# Altium PCB lm3478.PcbDoc
Units mil, origin at the board's own origin, x right, y up, seen from the top; angles counter-clockwise.
Board outline 1877.8 x 1600 mil, 2 copper layers (Top Layer, Bottom Layer); 30 components, 17 nets, 73 pads, 16 vias.
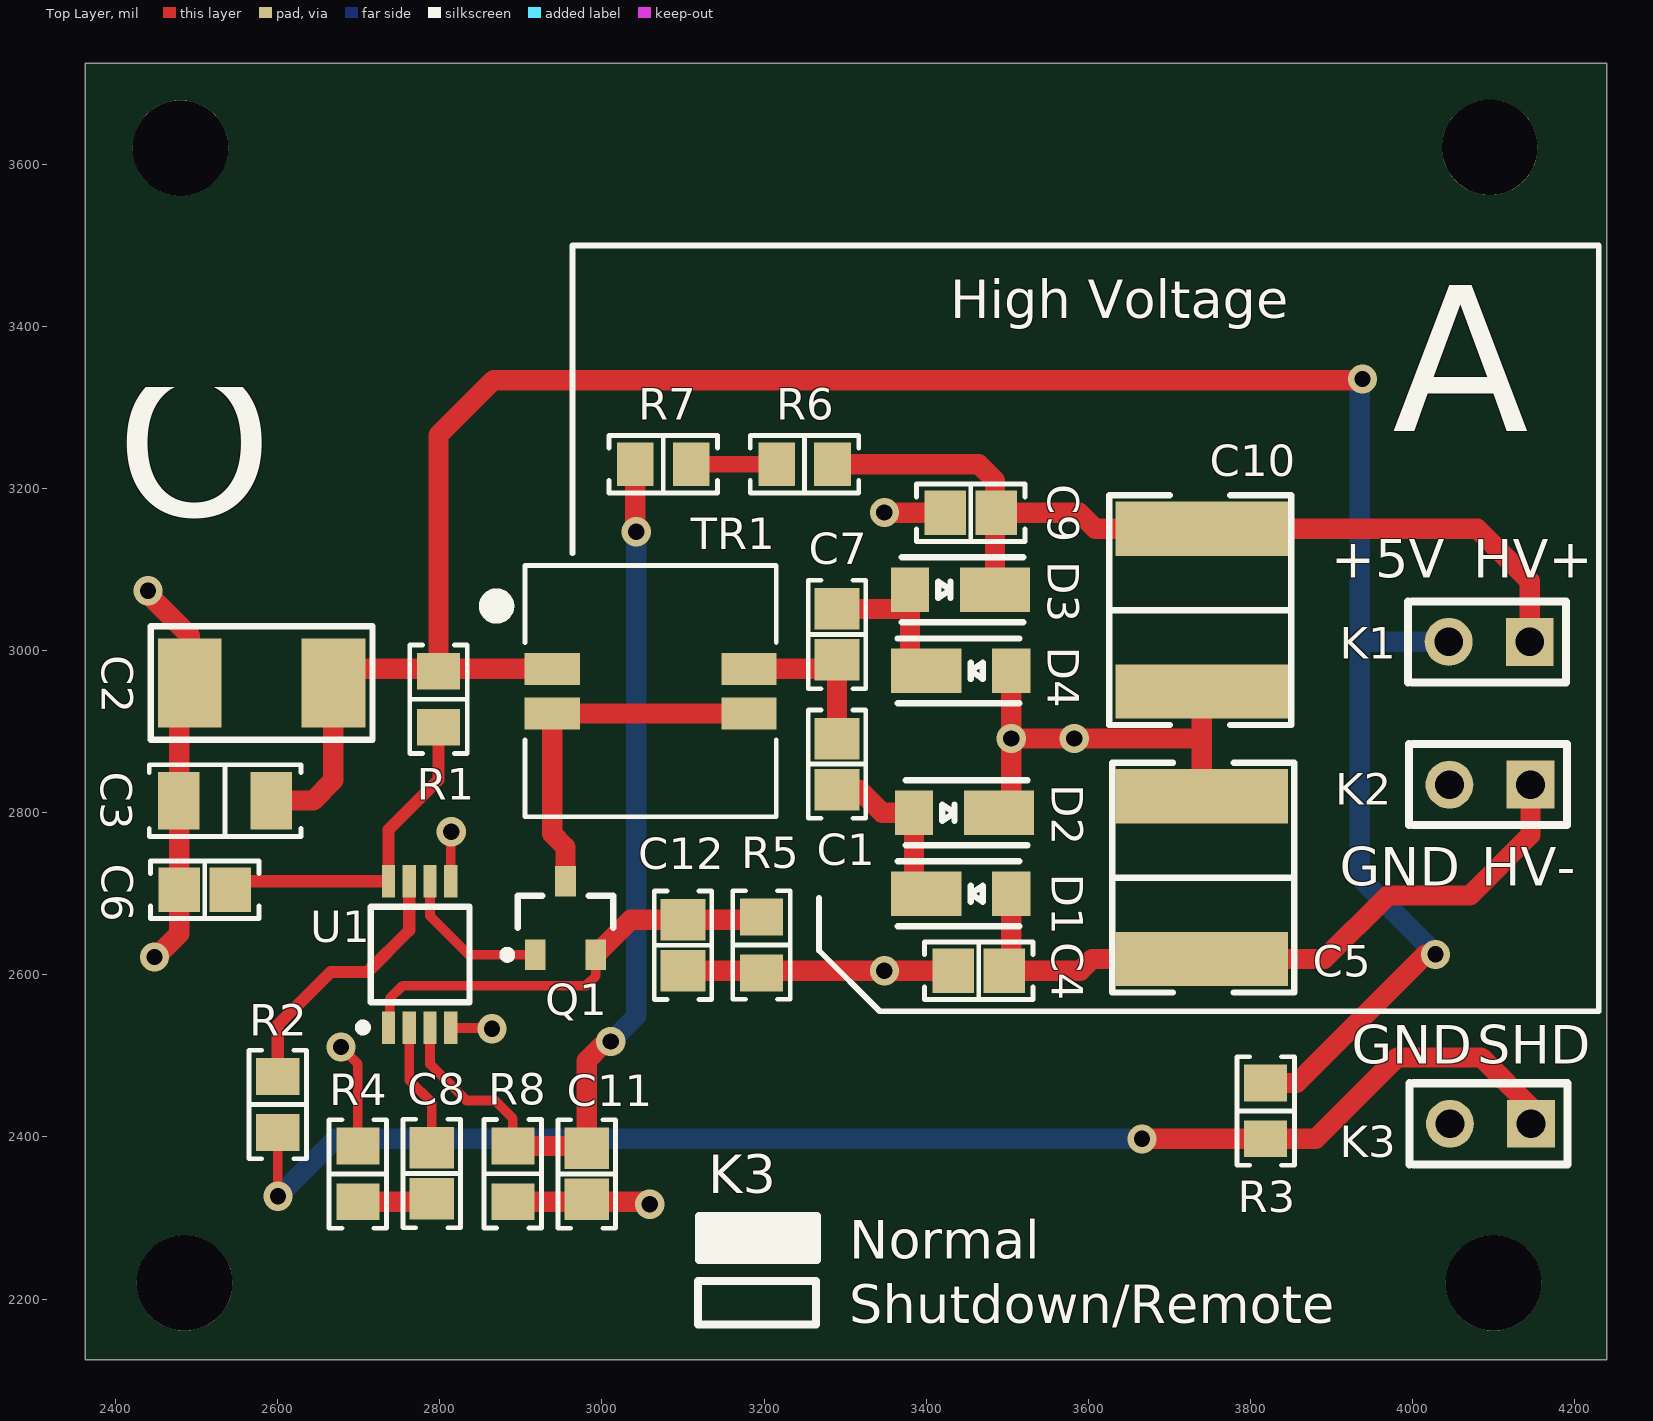
[diagram p0: Top Layer view]
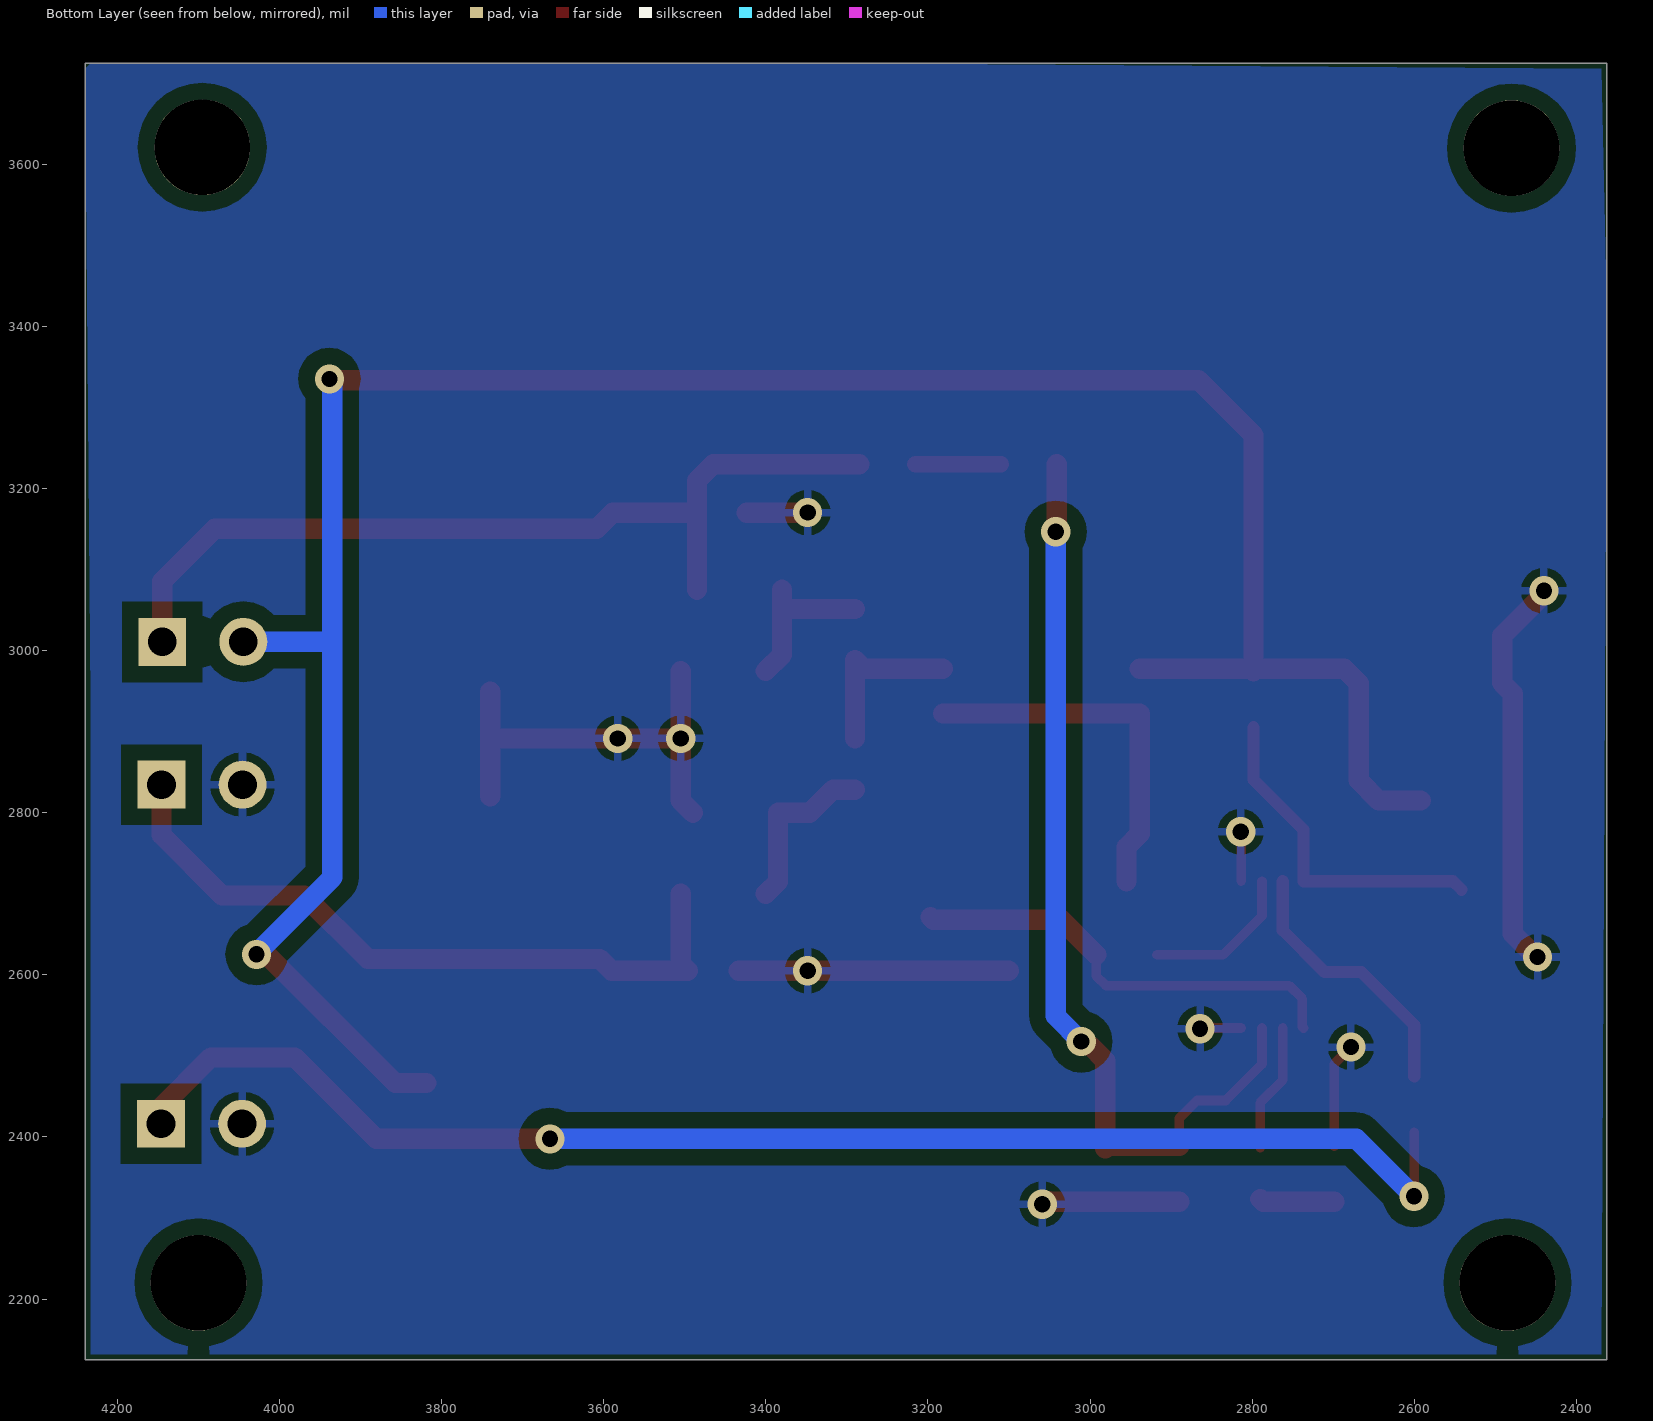
[diagram p1: Bottom Layer view, seen from below]
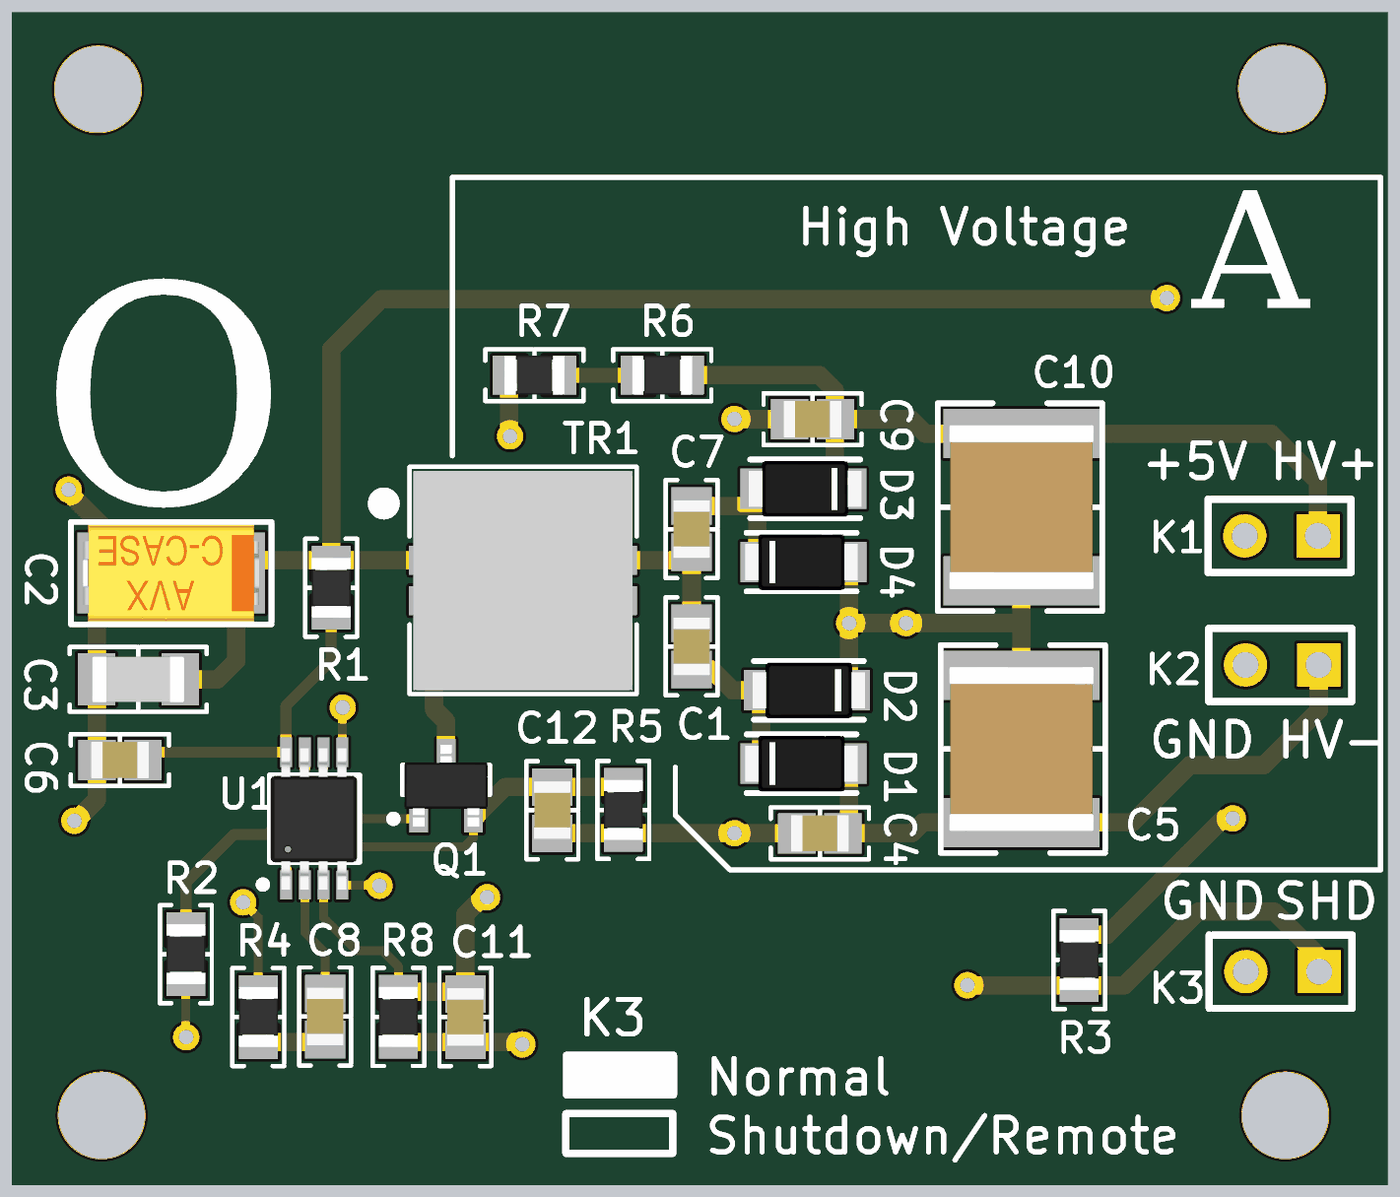
[diagram p2: 3D render of the assembled board from above, using the file's embedded part models]

## Layer stack, top to bottom
Top Solder: solder mask 0.4, Solder Resist, Dk 3.5
Top Layer: signal copper 1.4
Dielectric 1: dielectric 12.6, FR-4, Dk 4.8
Bottom Layer: signal copper 1.4
Bottom Solder: solder mask 0.4, Solder Resist, Dk 3.5

## Board outline
2362.2,2125 4240,2125 4240,3725 2362.2,3725

## Design rules (kind name [scope] priority, off if disabled: settings)
Clearance Clearance_poly [InPolygon] p1: gap=20
Clearance Clearance_1 [All] p2: gap=8
HoleSize [All] p1: absolutevalues=TRUE maxlimit=200 minlimit=1 maxpercent=80.000 minpercent=20.000
MinimumSolderMaskSliver [All] p1: minsoldermaskwidth=0
PolygonConnect [All] p1: connectstyle=Relief reliefconductorwidth=10 reliefentries=4 polygonreliefangle="90 Angle" airgapwidth=10
RoutingVias [All] p1: holewidth=28 width=50 viastyle="Through Hole" minholewidth=28 minwidth=50 maxholewidth=28 maxwidth=50
SilkToSolderMaskClearance [IsPad] p1: minsilkscreentomaskgap=0 clearancetoexposedcopper=TRUE
SolderMaskExpansion [All] p1: expansion=4
Width [All] p1: maxlimit=50 minlimit=10 preferedwidth=15
27 further rules are at their usual default settings.

## Components (designator, comment, footprint, x,y, rotation, side; value= is the part's Value field where it differs from the comment)
C1 "100nF/250V" "CAP 0805/2012" 3290,2860 r270 top
C2 "100uF/6.3V" "CAP CASE C" 2580,2960 r180 top
C3 "10uF/16V" "CAP 1206/3216" 2535,2815 r0 top
C4 "100nF/250V" "CAP 0805/2012" 3465,2605 r0 top
C5 "1uF/250V" "CAP 2220/5650" 3740,2720 r270 top
C6 "100nF/25V" "CAP 0805/2012" 2510,2705 r180 top
C7 "100nF/250V" "CAP 0805/2012" 3290,3020 r90 top
C8 "100nF/25V" "CAP 0805/2012" 2790,2355 r90 top
C9 "100nF/250V" "CAP 0805/2012" 3455,3170 r0 top
C10 "1uF/250V" "CAP 2220/5650" 3740,3050 r90 top
C11 "100 pf" "CAP 0805/2012" 2981.3,2354.33 r90 top
C12 "10nF/50V" "CAP 0805/2012" 3100,2636.5 r90 top
D1 "DFLU1400-7" POWERDI-123 3440,2700 r0 top
D2 "DFLU1400-7" POWERDI-123 3450,2800 r180 top
D3 "DFLU1400-7" POWERDI-123 3445,3075 r180 top
D4 "DFLU1400-7" POWERDI-123 3440,2975 r0 top
K1 "1x2PLS" JUMPER2 4144.69,3010.83 r270 top
K2 "1x2PLS" JUMPER2 4145.67,2834.65 r270 top
K3 "1x2PLS" JUMPER2 4146.26,2416.18 r270 top
Q1 "IRLML2803TRPBF" SOT-23-3 2955,2670 r90 top
R1 "20R" "RES 0805/2012" 2798.23,2939.96 r90 top
R2 "15K" "RES 0805/2012" 2600,2440 r270 top
R3 "15K" "RES 0805/2012" 3818.9,2432.09 r90 top
R4 "1K" "RES 0805/2012" 2698.82,2354.33 r270 top
R5 "0.1R" "RES 0805/2012" 3196.85,2636.81 r90 top
R6 "510K" "RES 0805/2012" 3250,3230 r0 top
R7 "510K" "RES 0805/2012" 3075.55,3230 r0 top
R8 "14K3" "RES 0805/2012" 2890,2354.45 r90 top
TR1 "CTX02-18714-R" CTX02-18714-R 3060,2950 r0 top
U1 "LM3478MMX/NOPB" MSOP-8 2775,2625 r90 top

## Footprints (in the part's own frame and the unit in brackets; to place one, negate y for a bottom-side part, rotate by r counter-clockwise, add the part's x,y. Pads: shape width x height; smd on the part's side, far side on the other; paste and mask are expansions set on the pad)
"CAP 0805/2012" [mm] "Chip Capacitor, 2-Leads, Body 2.00x1.20mm, IPC Medium Density"
  rect 1.3x1.4 smd: 1(-0.8,0) 2(0.8,0)
  silkscreen extent -1.7,-0.9 1.7,0.9, body extent -1,-0.64 1,0.64, height 1.26
"CAP 1206/3216" [mm] "Chip Capacitor, 2-Leads, Body 3.25x1.60mm, IPC Medium Density"
  rect 1.3x1.8 smd: 1(-1.45,0) 2(1.45,0)
  silkscreen extent -2.37,-1.12 2.37,1.12, body extent -1.6,-0.8 1.6,0.8, height 1.2
"CAP 2220/5650" [mm] "Chip Capacitor, 2-Leads, Body 5.70x5.00mm, IPC Medium Density"
  rect 1.7x5.4 smd: 1(-2.55,0) 2(2.55,0)
  silkscreen extent -3.6,-2.8 3.6,2.9, body extent -2.85,-2.5 2.85,2.5, height 2
"CAP CASE C" [mm] "Tantalum Capacitors SMD"
  rect 2x2.8 smd: 1(-2.25,0) 2(2.25,0)
  silkscreen extent -3.47,-1.78 3.47,1.78, body extent -3.05,-1.67 3.05,1.68, height 2.7
CTX02-18714-R [mm]
  rect 1.73x1 smd: 1(-3.085,0.7) 2(-3.085,-0.7) 3(3.085,-0.7) 4(3.085,0.7)
  silkscreen extent -5.08,-3.94 3.94,3.94, body extent -3.8,-3.81 3.8,3.79, height 4.33
JUMPER2 [mm]
  rect 1.5x1.5 hole 0.9: 1(0,0)
  round 1.5 hole 0.9: 2(0,-2.54)
  silkscreen extent -1.27,-3.81 1.27,1.14
MSOP-8 [mm]
  rect 1.02x0.41 smd: 1(-2.3,0.975) 2(-2.3,0.325) 3(-2.3,-0.325) 4(-2.3,-0.975) 5(2.3,-0.975) 6(2.3,-0.325) 7(2.3,0.325) 8(2.3,0.975)
  silkscreen extent -2.41,-1.57 1.5,1.9, body extent -2.46,-1.49 2.44,1.51, height 1.15
POWERDI-123 [mm]
  rect 2.2x1.4 smd: 1(-1.016,0)
  rect 1.2x1.4 smd: 2(1.651,0)
  silkscreen extent -1.91,-1.02 1.91,1.02, body extent -1.95,-0.96 1.95,0.97, height 1
"RES 0805/2012" [mm] "Chip Resistor, 2-Leads, Body 2.00x1.25mm, IPC Medium Density"
  rect 1.15x1.35 smd: 1(-0.875,0) 2(0.875,0)
  silkscreen extent -1.7,-0.9 1.7,0.9, body extent -1.05,-0.67 1.05,0.68, height 0.6
SOT-23-3 [mm] "SOT23, 3-Leads, Body 2.90x2.40mm, Pitch 0.95mm, IPC Medium Density"
  rect 0.95x0.65 smd: 1(-1.15,0.95) 2(-1.15,-0.95) 3(1.15,0)
  silkscreen extent -1.27,-1.5 0.7,1.95, body extent -1.41,-1.45 1.41,1.45, height 1.5

## Part data
C1 C4 C7 C9: library part CGA4J3X7T2E104K125AA, "CAPACITOR 0805 100nF 250V, 10%, X7T"
C2: library part TPSC107M006R0150, "CAPACITOR 100uF 2312 6V3 TANT"
C3: library part GCM31CR71C106KA64L, "CAPACITOR 1206 10uF 16V X7R 10%"
C5 C10: library part GRM55DR72E105KW01L, "CAPACITOR 2220 1uF 250V X7R"
C6 C8: library part GRM21BR71E104KA01L, "CAPACITOR 0805 100nF 25V X7R 10%"
C11: library part GRM216R71H102KA01D, "CAPACITOR 0805 1nF 50V X7R 10%"
C12: library part GRM216R71H103JA01D, "CAPACITOR 0805 10nF 50V X7R 5%"
D1 D2 D3 D4: "DIODE 400V 1A POWERDI123"
Q1: "MOSFET N-CH 30V 1.2A 3-Pin SOT-23 T/R"
R1: library part ERJ6ENF20R0V, "RESISTOR 0805 20R 1%"
R2 R3: library part ERJ6ENF1502V, "RESISTOR 0805 15K 1%"
R4: library part ERJ6ENF1001V, "RESISTOR 0805 1K 1%"
R5: library part ERJ6RSFR10V, "RESISTOR 0805 0.1R 1%"
R6 R7: library part ERJ6ENF5103V, "RESISTOR 0805 510K 1%"
R8: library part ERJ6ENF6491V, "RESISTOR 0805 6K49 1%"
TR1: "COUPLED INDUCTOR 1:4"
U1: "DC/DC Controller 2.97V to 40V Input"

## Free pads (board coordinates)
  round 118.11 hole 118.11: 0(2480,3620) 0(2485,2220) 0(4095.39,3620.98) 0(4100,2220)

## Via types
v1: diameter 36, hole 20, Top Layer to Bottom Layer, 16 vias

## Nets (pads, with @x,y where several pads share a name; then routed paths per layer and width w, separated by ;. In a path a pad name is that pad's centre, name@x,y a point inside that pad or via, vN(x,y) a via of type N, cw(c..) or ccw(c..) an arc to the next point about the centre after c; other vN are vias at no path point)
+5V: C2.1 C3.2 K1.2 R1.2 R3.2 TR1.1 | length 3067.4
  Top Layer w25: C3.2 2643.74,2815 2668.58,2839.84 C2.1 2686.14,2977.56 R1.2@2798.23,2977.56 ; R1.2 R1.2@2798.23,2977.56 ; TR1.1 R1.2@2798.23,2977.56 ; R3.2 3857.28,2466.54 v1@4015.75,2625 ; v1@3938.43,3333.66 2866.14,3333.66 2798.23,3265.75 R1.2@2798.23,2977.56
  Bottom Layer w25: v1(3938.43,3335.28) 3935,3331.85 3935,3010 ; v1@4030,2625 3935,2720 3935,3010 ; K1.2 3935.83,3010.83 3935,3010
  other v1: 4028.43,2625.28
FB: C11.2 R7.1 R8.2 U1.3 | length 1152.5
  Top Layer w12: U1.3 2787.8,2489.76 2832.68,2444.88 2868.11,2444.88 2890,2422.99 R8.2
  Top Layer w25: R8.2 2978.23,2388.9 C11.2 2981.3,2494.09 v1@3000,2512.8 ; R7.1 3041.1,3155.75 v1@3041.34,3155.51
  Bottom Layer w25: v1(3010.83,2517.72) 3042.32,2549.21 v1(3042.32,3146.65)
GND: C2.2 C3.1 C4.1 C5.1 C6.2 C9.1 C10.1 C11.1 C12.1 D2.1 D4.2 K2.2 K3.2 R4.1 R5.1 R8.1 U1.4 U1.5 | length 1789.8
  Top Layer w12: v1(2678.15,2510.83) 2698.82,2490.16 R4.1 ; U1.4 2847.44,2534.45 v1@2848.43,2535.43 ; U1.5 v1@2813.39,2759.25
  Top Layer w25: v1@2443.9,3065.94 2491.42,3018.43 C2.2 2478.5,2947.09 C6.2 2478.5,2650.75 v1@2455.71,2627.95 ; R8.1 3049.33,2320 v1@3050.2,2320.87 ; C12.1 v1(3348.43,2605) C4.1 ; v1@3356.3,3171.26 3357.56,3170 C9.1 ; D2.1 3505,2815 v1(3505,2891.73) ; D4.2 v1(3505,2891.73) ; C5.1 3740,2892.72 ; C10.1 3740,2892.72 ; v1(3505,2891.73) v1(3582.68,2891.73) 3739.02,2891.73 3740,2892.72
  other v1: 3059.06,2316.93 2864.17,2533.46 2447.83,2622.05 2813.98,2776.57 2439.96,3073.82 3348.43,3170.28
HV+: C9.2 C10.2 D3.1 K1.1 R6.2 | length 1113.8
  Top Layer w25: R6.2 3464.88,3230 3485,3209.88 C9.2@3485,3168.5 ; D3.1 C9.2@3485,3168.5 ; K1.1 4144.69,3085.63 4079.92,3150.39 C10.2 3608.46,3150.39 3588.86,3170 C9.2 C9.2@3485,3168.5
HV-: C4.2 C5.2 D1.2 K2.1 | length 879.1
  Top Layer w25: D1.2 3505,2613.5 C4.2 3590.24,2605 3604.84,2619.61 C5.2 3891.26,2619.61 3969.49,2697.83 4070.87,2697.83 4145.67,2772.64 K2.1
ISEN: C12.2 Q1.2 R5.2 U1.1 | length 552.4
  Top Layer w12: U1.1 2738.13,2535.97 2738.13,2570.53 2754.22,2586.61 2980.32,2586.61 2992.4,2598.7 Q1.2
  Top Layer w25: Q1.2 3035.67,2667.99 C12.2 3193.58,2667.99 R5.2
NetC1_1: C1.1 C7.1 TR1.4 | length 210.1
  Top Layer w25: TR1.4 3279.06,2977.56 C7.1 C1.1
NetC1_2: C1.2 D1.1 D2.2 | length 213
  Top Layer w25: C1.2 3317.17,2828.5 3345.67,2800 D2.2 3385,2715 D1.1
NetC6_1: C6.1 R1.1 U1.8 | length 415
  Top Layer w15: C6.1 2552.05,2715.55 U1.8 2736.61,2778.94 2798.23,2840.55 R1.1
NetC7_2: C7.2 D3.2 D4.1 | length 199.7
  Top Layer w25: C7.2 3376.65,3051.5 D3.2@3380,3054.84 ; D3.2 D3.2@3380,3054.84 ; D4.1 3380,2995 D3.2@3380,3054.84
NetC8_1: C8.1 R4.2 | length 92.7
  Top Layer w25: R4.2 2786.38,2319.88 C8.1
NetC8_2: C8.2 U1.2 | length 159.5
  Top Layer w12: U1.2 2762.2,2470.08 2790,2442.28 C8.2
NetQ1_1: Q1.1 U1.6 | length 192.4
  Top Layer w12: U1.6 2787.8,2672.83 2835.91,2624.72 Q1.1
NetQ1_3: Q1.3 TR1.2 TR1.3 | length 456.9
  Top Layer w25: Q1.3 2955,2757.6 2938.54,2774.06 TR1.2 TR1.3
NetR2_1: R2.1 U1.7 | length 334.8
  Top Layer w15: R2.1 2600,2537.99 2665.35,2603.35 2710.63,2603.35 2762.2,2654.92 U1.7
NetR6_1: R6.1 R7.2 | length 105.6
  Top Layer w20: R7.2 R6.1
SHD: K3.1 R2.2 R3.1 | length 1724.1
  Top Layer w12: R2.2 2600,2327.17 v1(2600.39,2326.77)
  Top Layer w25: v1(3666.34,2397.64) R3.1 3880.91,2397.64 3981.3,2498.03 4084.65,2498.03 K3.1@4148.23,2434.45
  Bottom Layer w25: v1(2600.39,2326.77) 2671.26,2397.64 v1(3666.34,2397.64)

## Polygon pours and split planes (outlines as drawn)
GND on Bottom Layer "btm" (solid, remove dead copper, pour order 0): 2369.09,3718.11 2362.2,3413.39 2369.09,2131.89 4233.11,2131.89 4233.11,2180 4233.11,2230 4233.11,2285 4233.11,2940 4240,3725 3295,3725

## Silkscreen, mask and mechanical layers (free items; w line width, h text height)
Top Overlay:
  rectangle: 3119.53,2252.99 3261.26,2302.2
  lines w7.09: 2963.58,3120.08 2963.58,3500 4230,3500 4230,2555 3342.64,2555 3267.72,2629.92 3267.72,2694.88
  lines w10: 3118.54,2168.35 3263.23,2168.35 3264.21,2168.35 3264.21,2222.48 3118.54,2222.48 3118.54,2168.35 ; 3119.53,2248.07 3119.53,2302.2 3265.2,2302.2 3265.2,2248.07 3264.21,2248.07 3119.53,2248.07
  text "High Voltage" at 3430,3410 h47.24
  text "A" at 3975,3210 h314.96
  text "+5V" at 3900,3090 h47.24
  text "HV+" at 4075,3090 h47.24
  text "O" at 2400,3055 h590.55
  text "GND" at 3910,2710 h47.24
  text "HV-" at 4085,2710 h47.24
  text "GND" at 3925,2490 h47.24
  text "SHD" at 4080,2490 h47.24
  text "K3" at 3131.34,2330.75 h47.24
  text "Normal" at 3305,2250 h47.24
  text "Shutdown/Remote" at 3305,2170 h47.24
Mechanical 1:
  lines w10: 2362.2,2125 4235,2125 4235,3725 2362.2,3725 2362.2,2125